# EAGLE board PCB (EAGLE 9.7.0)
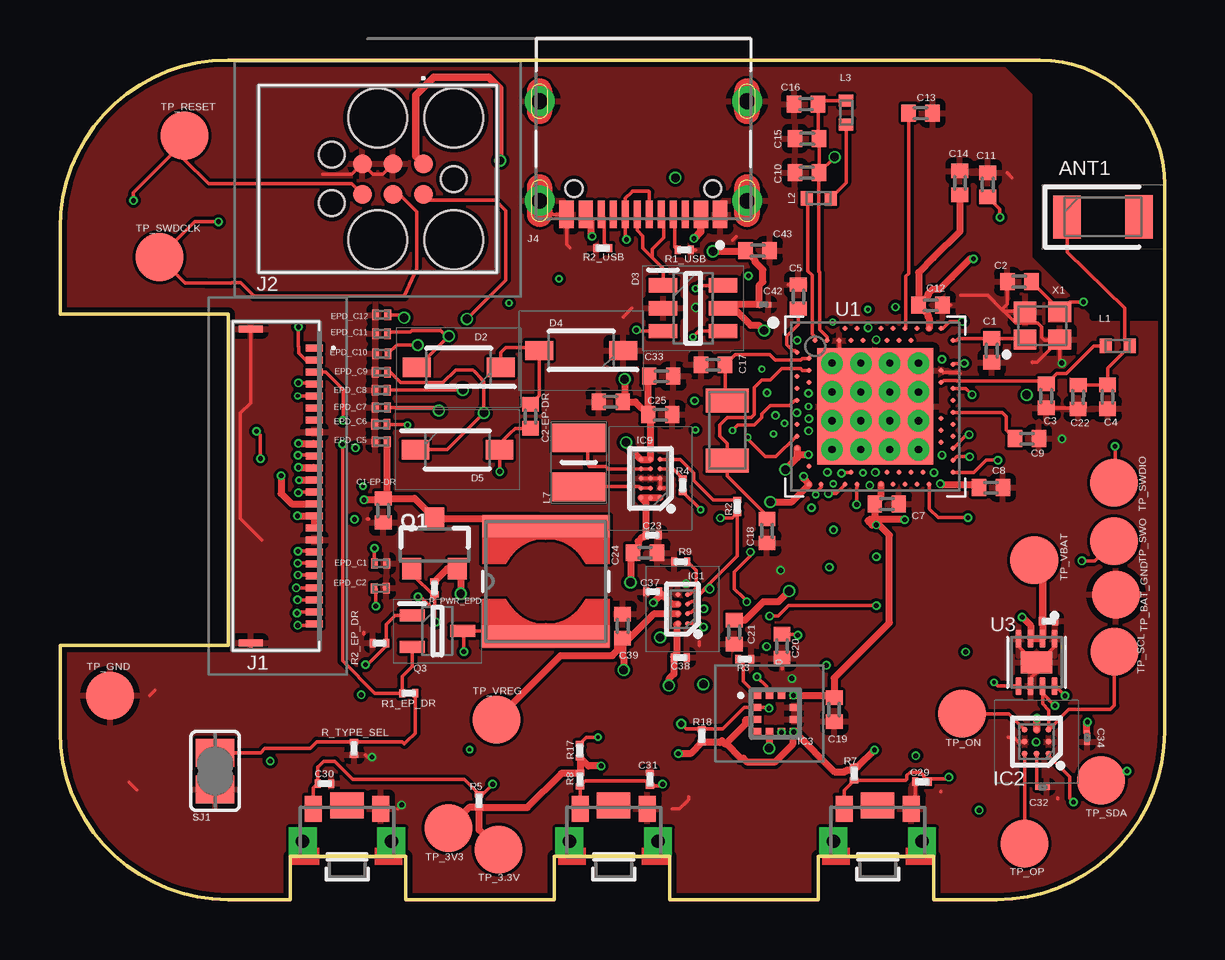
[diagram p0: board, top side]
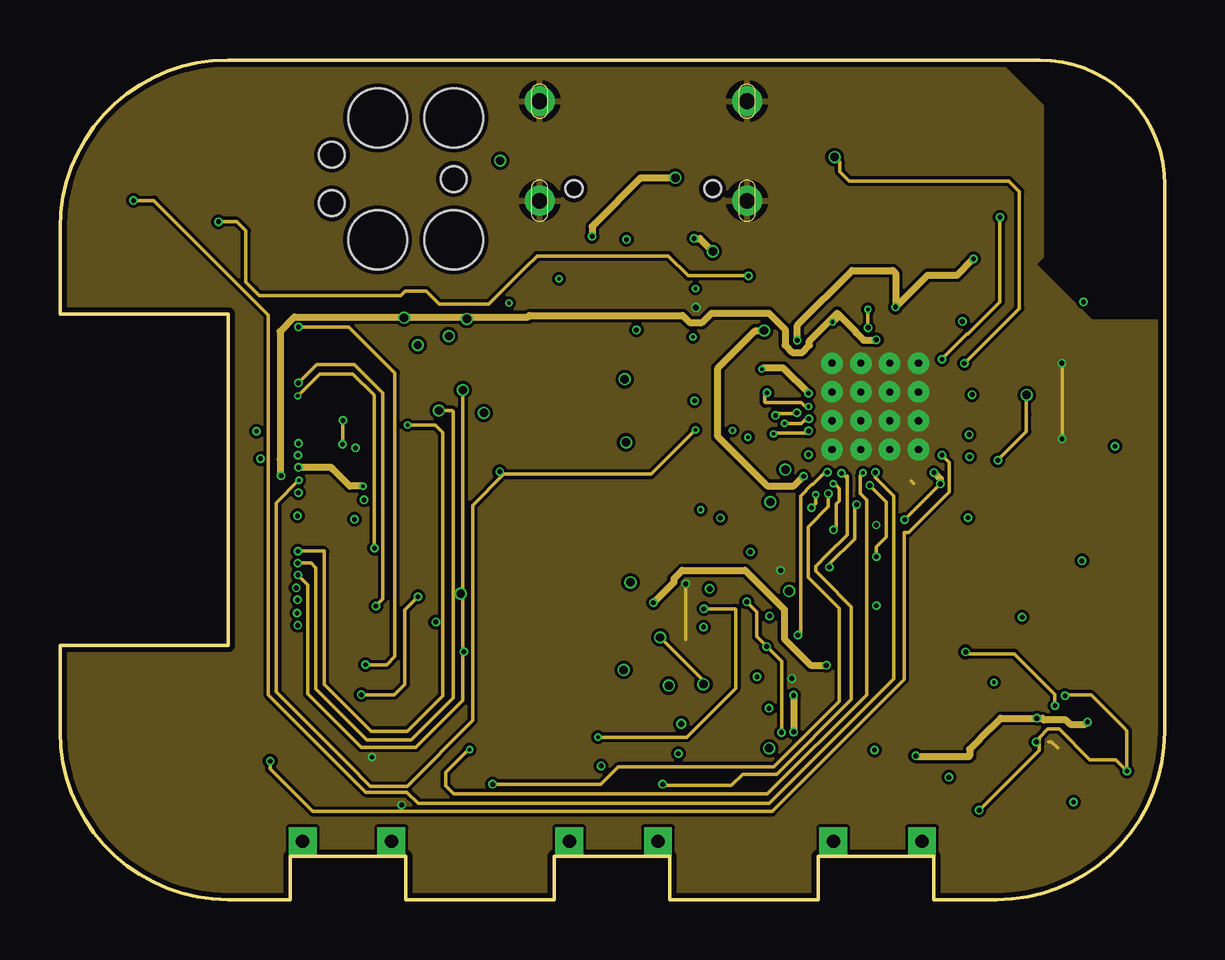
[diagram p1: board, inner layer Route2]
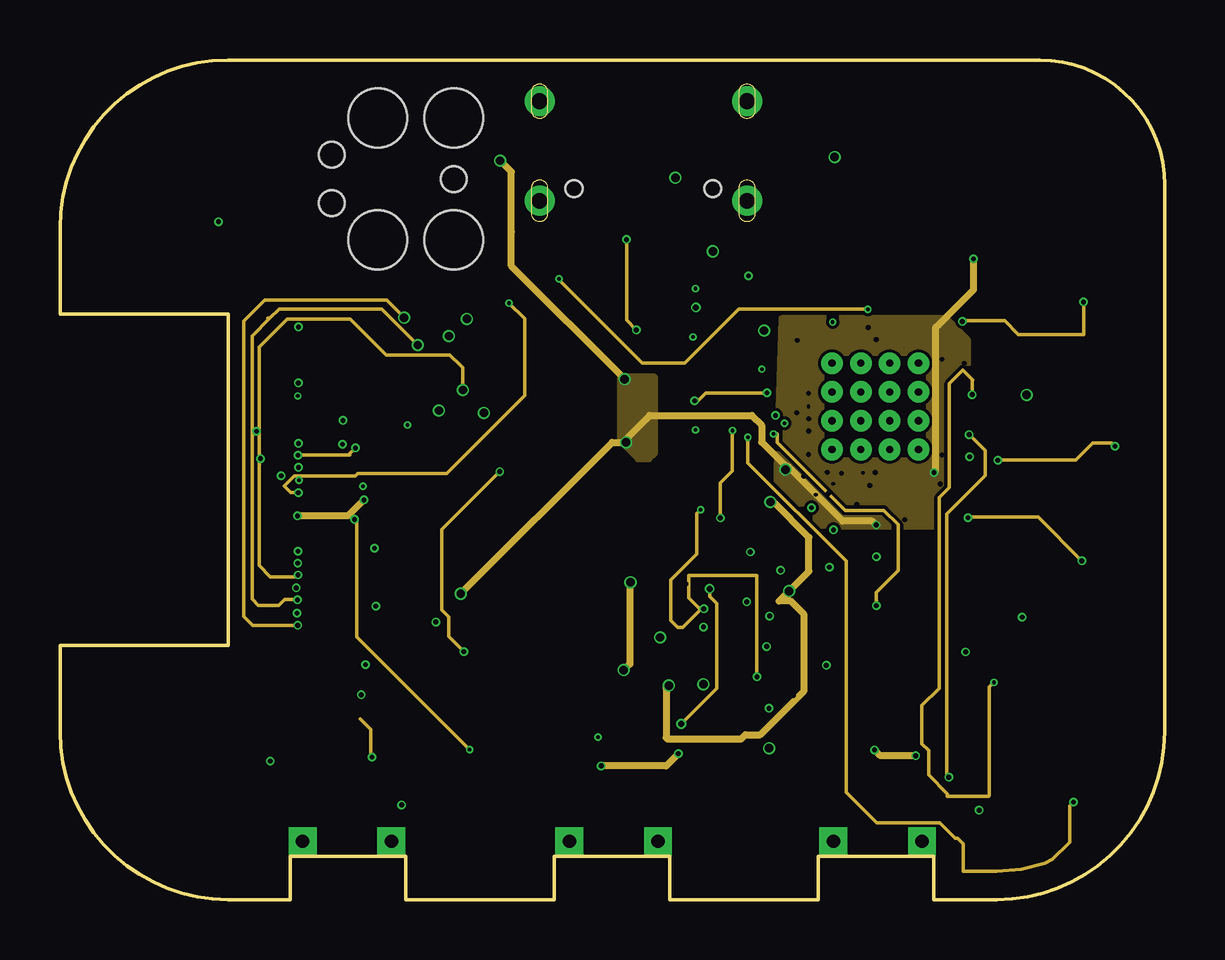
[diagram p2: board, inner layer Route15]
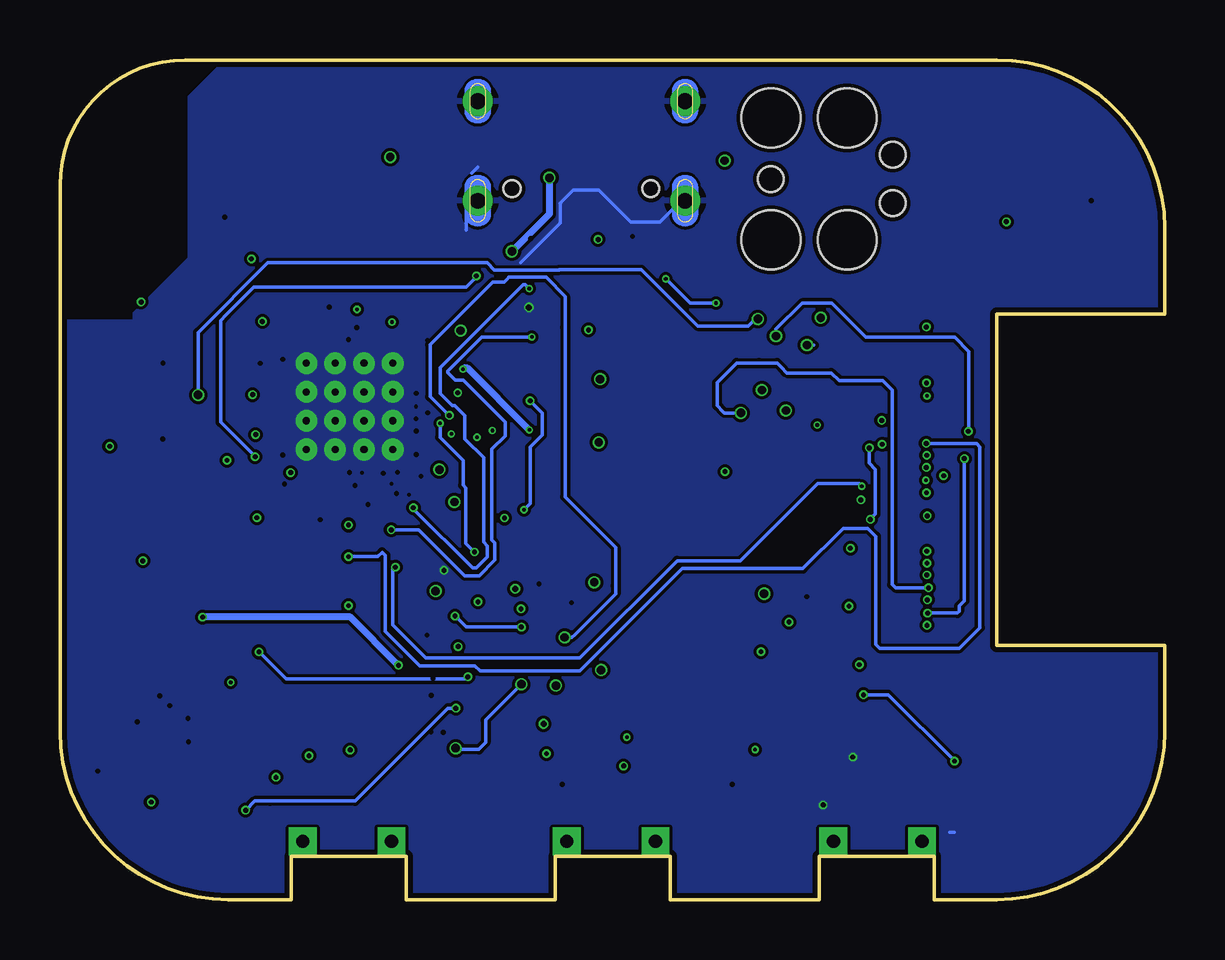
[diagram p3: board, bottom side, seen from below]

Size 46.03 x 35 mm. Coordinates in mm from the lower left corner, seen from the top.
Outline: 39.03,0 36.4,0 36.4,1.8 31.6,1.8 31.6,0 25.4,0 25.4,1.8 20.6,1.8 20.6,0 14.4,0 14.4,1.8 9.6,1.8 9.6,0 7,0 arc-90 0,7 0,10.6 7,10.6 7,24.4 0,24.4 0,28 arc-90 7,35 39,35 40.82,35 arc-90 46.03,29.79 46.03,25.91 46.03,7 arc-90 46.03,7 arc-90 39.03,0
Copper layers (1*16): Top 0.035mm / dielectric 1.6mm / Bottom 0.035mm
Design rules "jlcpcb-2layers.dru *": minimum track width 5mil, minimum drill 0.15mm, track to track 5mil, track to pad 5mil, pad to pad 5mil, via to via 5mil, smd to smd 5mil, copper to edge 0.2mm, drill to drill 6mil, minimum pad ring 0.3mm, minimum via ring 3mil, stop-mask expansion 4mil, vias tented up to drill 0mil, thermal gap 10mil

## Footprints (pad centres in the part's own frame; a part is rotated, then mirrored left to right if it is on the bottom)
2450AT18B100E_ANTC3216X140N = smd 1.15 x 1.8: 1 -1.5,0; 2 1.5,0
PERFECT_0402_0402 = smd 0.6 x 0.7: 1 -0.5,0; 2 0.5,0
GRM011R60J152KE01L_1_0201 = smd 0.35 x 0.25: 1 0,0.275; 2 0,-0.275
GRM011R60J152KE01L_2_CAPC0201X13N = smd 0.22 x 0.23: 1 -0.185,0; 2 0.185,0
ESP32_C6_LIBRARY_5_SOD3716X135N = smd 1.15 x 0.8: 1 -1.75,0; 2 1.75,0
ESP32_C6_LIBRARY_3_SOT95P280X145-6N = smd 1.2 x 0.6: 1 -1.25,0.95; 2 -1.25,0; 3 -1.25,-0.95; 4 1.25,-0.95; 5 1.25,0; 6 1.25,0.95
NORDIC_NRF_3_RESC0201_L = smd 0.28 x 0.43: 1 -0.255,0; 2 0.255,0
BQ25180YBGR_BGA8C40P2X4_100X155X50 = smd 0.2 x 0.2: A1 -0.2,0.6; A2 0.2,0.6; B1 -0.2,0.2; B2 0.2,0.2; C1 -0.2,-0.2; C2 0.2,-0.2; D1 -0.2,-0.6; D2 0.2,-0.6
DRV2605YZFR_BGA9C50P3X3_144X144X62 = smd 0.25 x 0.25: A1 -0.5,0.5; A2 0,0.5; A3 0.5,0.5; B1 -0.5,0; B2 0,0; B3 0.5,0; C1 -0.5,-0.5; C2 0,-0.5; C3 0.5,-0.5
BMA423_BMA423 = smd 0.3 x 0.35: 1 -0.75,-0.775; 2 -0.25,-0.775; 3 0.25,-0.775; 4 0.75,-0.775; 7 0.75,0.775; 8 0.25,0.775; 9 -0.25,0.775; 10 -0.75,0.775 | smd 0.35 x 0.3: 5 0.775,-0.25; 6 0.775,0.25; 11 -0.775,0.25; 12 -0.775,-0.25
RT6160AWSC_BGA15C40P3X5_140X230X60 = smd 0.216 x 0.216: A1 -0.4,0.8; A2 0,0.8; A3 0.4,0.8; B1 -0.4,0.4; B2 0,0.4; B3 0.4,0.4; C1 -0.4,0; C2 0,0; C3 0.4,0; D1 -0.4,-0.4; D2 0,-0.4; D3 0.4,-0.4; E1 -0.4,-0.8; E2 0,-0.8; E3 0.4,-0.8
503480-2400_5034802400 = smd 0.3 x 0.7: 1 -5.75,1.525; 2 -5.25,1.525; 3 -4.75,1.525; 4 -4.25,1.525; 5 -3.75,1.525; 6 -3.25,1.525; 7 -2.75,1.525; 8 -2.25,1.525; 9 -1.75,1.525; 10 -1.25,1.525; 11 -0.75,1.525; 12 -0.25,1.525; 13 0.25,1.525; 14 0.75,1.525; 15 1.25,1.525; 16 1.75,1.525; 17 2.25,1.525; 18 2.75,1.525; 19 3.25,1.525; 20 3.75,1.525; 21 4.25,1.525; 22 4.75,1.525; 23 5.25,1.525; 24 5.75,1.525 | smd 0.3 x 1: MP1 -6.54,-1.125; MP2 6.54,-1.125
TC2030-IDC_TC2030IDC = smd 0.783 x 0.783: 1 -0.953,-0.635; 2 -0.953,0.635; 3 0.317,-0.635; 4 0.317,0.635; 5 1.588,-0.635; 6 1.588,0.635 | hole 2.451: -2.223,-2.54; -2.223,2.54; 0.952,-2.54; 0.952,2.54 | hole 1.067: -2.223,0; 2.857,-1.016; 2.857,1.016
KH-TYPE-C-16P_KINGHELM_KH-TYPE-C-16P = smd 0.6 x 1.15: A1_B12 -3.2,4.725; A4_B9 -2.4,4.725; A9_B4 2.4,4.725; A12_B1 3.2,4.725 | smd 0.3 x 1.15: A5 -1.25,4.725; A6 -0.25,4.725; A7 0.25,4.725; A8 1.25,4.725; B5 1.75,4.725; B6 0.75,4.725; B7 -0.75,4.725; B8 -1.75,4.725 | drill 0.65 pad 1.05: SH1 -4.32,0; SH2 4.32,0; SH3 -4.32,4.15; SH4 4.32,4.15 | hole 0.7: -2.89,3.65; 2.89,3.65
NORDIC_NRF_2_RESC0402_L = smd 0.5 x 0.6: 1 -0.5,0; 2 0.5,0
ESP32_C6_LIBRARY_2_IND_4828-WE-TPC_WRE = smd 0.9 x 5.3: 1 -2.286,0; 2 2.286,0
MLP2016SR47MT0S1_INDC2016X100N = smd 1.2 x 2.2: 1 -1.028,0; 2 1.028,0
ESP32_C6_LIBRARY_4_ESP32_C6_LIBRARY_4_ESP32_C6_LIBRARY_4_ESP32_C6_LIBRARY_4_ESP32_WROVER_SPARKFUN-DISCRETESEMI_SOT23-3 = smd 0.8 x 0.9: 1 -0.95,-1; 2 0.95,-1; 3 0,1.1
ESP32_C6_LIBRARY_6_SOT65P210X110-3N = smd 1.05 x 0.5: 1 -1.05,0.65; 2 -1.05,-0.65; 3 1.05,0
CPF0201D7K68C1_0201 = smd 0.35 x 0.25: 1 0,0.275; 2 0,-0.275
ERA-1AEB3401C_0201 = smd 0.35 x 0.25: 1 0,0.275; 2 0,-0.275
ESP32_C6_LIBRARY_7_JUMPER_SJ = smd 1.168 x 1.6: 1 -0.762,0; 2 0.762,0
2025-10-22_07-23-44_LIBRARY_SW_EVP-AKE31A_PAN = smd 0.711 x 1.092: 1 -1.4,-0.972; 2 1.4,-0.972 | drill 0.559 pad 0.914 square: 3 -1.848,0.381; 4 1.848,0.381 | smd 1.397 x 1.092: 5 0,-1.124
HECTOR_WATCH_1_TP20R = smd 2 x 2: TP 0,0
NORDIC_NRF_4_AQFN50P700X700X85_HS-74N = smd 4.85 x 4.85: P$74 0,0 | drill 0.3 pad 0.6: P$75 -1.8,1.8; P$76 -0.6,1.8; P$77 0.6,1.8; P$78 1.8,1.8; P$79 -1.8,0.6; P$80 -0.6,0.6; P$81 0.6,0.6; P$82 1.8,0.6; P$83 -1.8,-0.6; P$84 -0.6,-0.6; P$85 0.6,-0.6; P$86 1.8,-0.6; P$87 -1.8,-1.8; P$88 -0.6,-1.8; P$89 0.6,-1.8; P$90 1.8,-1.8 | smd 0.2 x 0.2: P$A8 -1.25,3.25; P$A10 -0.75,3.25; P$A12 -0.25,3.25; P$A14 0.25,3.25; P$A16 0.75,3.25; P$A18 1.25,3.25; P$A20 1.75,3.25; P$A22 2.25,3.25; P$A23 2.75,3.25; P$AA24 3.25,-2.25; P$AB2 -2.75,-2.5; P$AC5 -2,-2.75; P$AC9 -1,-2.75; P$AC11 -0.5,-2.75; P$AC13 0,-2.75; P$AC15 0.5,-2.75; P$AC17 1,-2.75; P$AC19 1.5,-2.75; P$AC21 2,-2.75; P$AC24 3.25,-2.75; P$AD2 -2.75,-3.25; P$AD4 -2.25,-3.25; P$AD6 -1.75,-3.25; P$AD8 -1.25,-3.25; P$AD10 -0.75,-3.25; P$AD12 -0.25,-3.25; P$AD14 0.25,-3.25; P$AD16 0.75,-3.25; P$AD18 1.25,-3.25; P$AD20 1.75,-3.25; P$AD22 2.25,-3.25; P$AD23 2.75,-3.25; P$B1 -3.25,2.75; P$B3 -2.5,2.75; P$B5 -2,2.75; P$B7 -1.5,2.75; P$B9 -1,2.75; P$B11 -0.5,2.75; P$B13 0,2.75; P$B15 0.5,2.75; P$B17 1,2.75; P$B19 1.5,2.75; P$B24 3.25,2.75; P$C1 -3.25,2.25; P$D2 -2.75,2; P$D23 2.75,2; P$E24 3.25,1.75; P$F2 -2.75,1.5; P$F23 2.75,1.5; P$G1 -3.25,1.25; P$H2 -2.75,1; P$H23 2.75,1; P$J1 -3.25,0.75; P$J24 3.25,0.75; P$K2 -2.75,0.5; P$L1 -3.25,0.25; P$L24 3.25,0.25; P$M2 -2.75,0; P$N1 -3.25,-0.25; P$N24 3.25,-0.25; P$P2 -2.75,-0.5; P$P23 2.75,-0.5; P$R1 -3.25,-0.75; P$R24 3.25,-0.75; P$T2 -2.75,-1; P$T23 2.75,-1; P$U1 -3.25,-1.25; P$U24 3.25,-1.25; P$V23 2.75,-1.5; P$W1 -3.25,-1.75; P$W24 3.25,-1.75; P$Y2 -2.75,-2; P$Y23 2.75,-2
ESP32_C6_LIBRARY_SON50P200X200X80-9N = smd 0.76 x 0.27: 1 -0.985,0.75; 2 -0.985,0.25; 3 -0.985,-0.25; 4 -0.985,-0.75; 5 0.985,-0.75; 6 0.985,-0.25; 7 0.985,0.25; 8 0.985,0.75 | smd 0.9 x 1.3: 9 0,0
NORDIC_NRF_BT-XTAL_2016_N = smd 0.95 x 0.85: 1 -0.725,-0.575; 2 0.725,-0.575; 3 0.725,0.575; 4 -0.725,0.575
NORDIC_NRF_1_XTAL_3215_N = smd 1 x 1.8: 1 -1.25,0; 2 1.25,0

## Placement (x,y rotation side)
ANT1  [2450AT18B100E_ANTC3216X140N]  43.46,28.45 0.1 top
C1  12pF  [PERFECT_0402_0402]  38.82,22.89 270 top
C1-EP-DR  10uF  [PERFECT_0402_0402]  13.47,16.22 270 top
C2  12pF  [PERFECT_0402_0402]  39.97,25.76 180 top
C2-EP-DR  4.7uF/25V  [PERFECT_0402_0402]  19.61,20.14 270 top
C3  1pF  [PERFECT_0402_0402]  41.1,21 270 top
C4  1pF  [PERFECT_0402_0402]  43.65,20.96 270 top
C5  100nF  [PERFECT_0402_0402]  30.76,25.13 90 top
C6  4.7uF  [PERFECT_0402_0402]  22.95,20.75 180 top
C7  100nF  [PERFECT_0402_0402]  34.45,16.49 0 top
C8  100nF  [PERFECT_0402_0402]  38.79,17.17 0 top
C9  820pF  [PERFECT_0402_0402]  40.29,19.21 0 top
C10  N.C.  [PERFECT_0402_0402]  31.12,30.3 180 top
C11  100pF  [PERFECT_0402_0402]  38.65,29.8 90 top
C12  100nF  [PERFECT_0402_0402]  36.27,24.78 0 top
C13  N.C.  [PERFECT_0402_0402]  35.85,32.79 0 top
C14  4.7uF  [PERFECT_0402_0402]  37.49,29.87 90 top
C15  1.0uF  [PERFECT_0402_0402]  31.13,31.72 0 top
C16  47nF  [PERFECT_0402_0402]  31.08,33.15 180 top
C17  12pF  [PERFECT_0402_0402]  27.21,22.29 0 top
C18  12pF  [PERFECT_0402_0402]  29.46,15.36 90 top
C19  100nF  [PERFECT_0402_0402]  32.26,7.92 270 top
C20  4.7uF  [PERFECT_0402_0402]  30.08,10.56 270 top
C21  4.7uF  [PERFECT_0402_0402]  28.1,11.15 270 top
C22  N.C.  [PERFECT_0402_0402]  42.42,20.95 269.4 top
C23  0.1uF  [GRM011R60J152KE01L_1_0201]  24.68,15.19 90 top
C24  10uF  [PERFECT_0402_0402]  24.38,14.45 180 top
C25  22uF  [PERFECT_0402_0402]  25.01,20.21 0 top
C27  0.1uF  [GRM011R60J152KE01L_1_0201]  41.19,11.61 270 top
C29  1uF  [GRM011R60J152KE01L_1_0201]  35.92,4.91 90 top
C30  1uF  [GRM011R60J152KE01L_1_0201]  11.02,4.84 270 top
C31  1uF  [GRM011R60J152KE01L_1_0201]  24.58,5.01 0.8 top
C32  1uF  [GRM011R60J152KE01L_2_CAPC0201X13N]  40.94,4.69 180 top
C33  22uF  [PERFECT_0402_0402]  25.05,21.82 0 top
C34  0.1uF  [GRM011R60J152KE01L_2_CAPC0201X13N]  42.79,6.75 90.5 top
C37  1uF  [GRM011R60J152KE01L_1_0201]  24.7,12.83 90 top
C38  1uF  [GRM011R60J152KE01L_1_0201]  25.85,10.09 270 top
C39  10uF  [PERFECT_0402_0402]  23.44,11.4 90 top
C42  0.1uF  [GRM011R60J152KE01L_2_CAPC0201X13N]  29.33,24.8 0 top
C43  4.7uF  [PERFECT_0402_0402]  29.07,27.05 0 top
D2  MBR0530  [ESP32_C6_LIBRARY_5_SOD3716X135N]  16.61,22.18 180 top
D3  USBLC6-2SC6Y  [ESP32_C6_LIBRARY_3_SOT95P280X145-6N]  26.38,24.65 0 top
D4  MBR0530  [ESP32_C6_LIBRARY_5_SOD3716X135N]  21.72,22.89 180 top
D5  MBR0530  [ESP32_C6_LIBRARY_5_SOD3716X135N]  16.56,18.75 0 top
EPD_C1  1uF/50V  [NORDIC_NRF_3_RESC0201_L]  13.36,14.01 180 top
EPD_C2  1uF/50V  [NORDIC_NRF_3_RESC0201_L]  13.35,12.98 181 top
EPD_C5  0.1uF/50V  [NORDIC_NRF_3_RESC0201_L]  13.38,19.09 0 top
EPD_C6  1uF/50V  [NORDIC_NRF_3_RESC0201_L]  13.37,19.81 0 top
EPD_C7  1uF/50V  [NORDIC_NRF_3_RESC0201_L]  13.39,20.51 0 top
EPD_C8  1uF/50V  [NORDIC_NRF_3_RESC0201_L]  13.38,21.23 0 top
EPD_C9  1uF/50V  [NORDIC_NRF_3_RESC0201_L]  13.39,21.98 0 top
EPD_C10  1uF/50V  [NORDIC_NRF_3_RESC0201_L]  13.41,22.75 0 top
EPD_C11  1uF/50V  [NORDIC_NRF_3_RESC0201_L]  13.4,23.59 0 top
EPD_C12  1uF/50V  [NORDIC_NRF_3_RESC0201_L]  13.41,24.37 0 top
IC1  BQ25180YBGR  [BQ25180YBGR_BGA8C40P2X4_100X155X50]  25.94,12.11 180 top
IC2  DRV2605YZFR  [DRV2605YZFR_BGA9C50P3X3_144X144X62]  40.69,6.58 180 top
IC3  BMA421  [BMA423_BMA423]  29.81,7.76 270 top
IC9  RT6160AWSC  [RT6160AWSC_BGA15C40P3X5_140X230X60]  24.61,17.55 180 top
J1  503480-2400  [503480-2400_5034802400]  9.07,17.24 270 top
J2  TC2030-IDC  [TC2030-IDC_TC2030IDC]  14.19,30.04 180 top
J4  KH-TYPE-C-16P  [KH-TYPE-C-16P_KINGHELM_KH-TYPE-C-16P]  24.31,33.28 180 top
L1  3.9nH  [NORDIC_NRF_2_RESC0402_L]  44.07,23.08 0 top
L2  10uH  [NORDIC_NRF_2_RESC0402_L]  31.6,29.23 0 top
L3  15nH  [NORDIC_NRF_2_RESC0402_L]  32.76,32.8 90 top
L5  68uH  [ESP32_C6_LIBRARY_2_IND_4828-WE-TPC_WRE]  20.24,13.27 90 top
L7  FTC252012SR47MBCA  [MLP2016SR47MT0S1_INDC2016X100N]  21.62,18.22 90 top
Q1  20V/4.2A/52mΩ/1.4W  [ESP32_C6_LIBRARY_4_ESP32_C6_LIBRARY_4_ESP32_C6_LIBRARY_4_ESP32_C6_LIBRARY_4_ESP32_WROVER_SPARKFUN-DISCRETESEMI_SOT23-3]  15.61,14.78 0 top
Q3  SI1308EDL-T1-GE3  [ESP32_C6_LIBRARY_6_SOT65P210X110-3N]  15.73,11.19 0 top
R1_EP_DR  0.47  [CPF0201D7K68C1_0201]  14.53,8.6 270.8 top
R1_USB  5K1  [CPF0201D7K68C1_0201]  26.01,27.08 270 top
R2  0  [ERA-1AEB3401C_0201]  28.22,16.38 180 top
R2_EP_DR  10K  [CPF0201D7K68C1_0201]  13.31,10.69 90 top
R2_USB  5K1  [CPF0201D7K68C1_0201]  22.62,27.15 270 top
R3  0  [ERA-1AEB3401C_0201]  28.54,10.03 270 top
R4  0  [ERA-1AEB3401C_0201]  25.95,17.27 179.9 top
R5  10K  [ERA-1AEB3401C_0201]  17.46,4.11 0 top
R7  10K  [ERA-1AEB3401C_0201]  33.09,5.25 180 top
R8  10K  [ERA-1AEB3401C_0201]  21.67,5 180 top
R9  10K  [CPF0201D7K68C1_0201]  25.86,14.09 90 top
R17  3K3  [ERA-1AEB3401C_0201]  21.65,6.21 180 top
R18  3K3  [ERA-1AEB3401C_0201]  26.74,6.82 180 top
R_PWR_EPD  10K  [ERA-1AEB3401C_0201]  15.61,12.98 180 top
R_TYPE_SEL  2.2  [CPF0201D7K68C1_0201]  12.25,6.3 180 top
SJ1  [ESP32_C6_LIBRARY_7_JUMPER_SJ]  6.46,5.36 90 top
SW_DN  2025-10-22_07-23-44_LIBRARY_EVP-AKE31ASW_EVP-AKE31A_PAN  [2025-10-22_07-23-44_LIBRARY_SW_EVP-AKE31A_PAN]  34.07,2.81 180 top
SW_ENT  2025-10-22_07-23-44_LIBRARY_EVP-AKE31ASW_EVP-AKE31A_PAN  [2025-10-22_07-23-44_LIBRARY_SW_EVP-AKE31A_PAN]  23.07,2.81 180 top
SW_UP  2025-10-22_07-23-44_LIBRARY_EVP-AKE31ASW_EVP-AKE31A_PAN  [2025-10-22_07-23-44_LIBRARY_SW_EVP-AKE31A_PAN]  11.96,2.81 180 top
TP_3.3V  HECTOR_WATCH_1_TPTP20R  [HECTOR_WATCH_1_TP20R]  18.26,2.09 0 top
TP_3V3  HECTOR_WATCH_1_TPTP20R  [HECTOR_WATCH_1_TP20R]  16.18,2.98 0 top
TP_BAT_GND  HECTOR_WATCH_1_TPTP20R  [HECTOR_WATCH_1_TP20R]  44,12.72 0 top
TP_GND  HECTOR_WATCH_1_TPTP20R  [HECTOR_WATCH_1_TP20R]  2.09,8.51 0 top
TP_ON  HECTOR_WATCH_1_TPTP20R  [HECTOR_WATCH_1_TP20R]  37.59,7.75 0 top
TP_OP  HECTOR_WATCH_1_TPTP20R  [HECTOR_WATCH_1_TP20R]  40.19,2.33 0 top
TP_RESET  HECTOR_WATCH_1_TPTP20R  [HECTOR_WATCH_1_TP20R]  5.18,31.84 0 top
TP_SCL  HECTOR_WATCH_1_TPTP20R  [HECTOR_WATCH_1_TP20R]  43.93,10.33 0 top
TP_SDA  HECTOR_WATCH_1_TPTP20R  [HECTOR_WATCH_1_TP20R]  43.38,4.97 0 top
TP_SWDCLK  HECTOR_WATCH_1_TPTP20R  [HECTOR_WATCH_1_TP20R]  4.14,26.78 0 top
TP_SWDIO  HECTOR_WATCH_1_TPTP20R  [HECTOR_WATCH_1_TP20R]  43.92,17.38 0 top
TP_SWO  HECTOR_WATCH_1_TPTP20R  [HECTOR_WATCH_1_TP20R]  43.93,14.94 0 top
TP_VBAT  HECTOR_WATCH_1_TPTP20R  [HECTOR_WATCH_1_TP20R]  40.59,14.16 0 top
TP_VREG  HECTOR_WATCH_1_TPTP20R  [HECTOR_WATCH_1_TP20R]  18.18,7.49 0 top
U1  NRF52840_QF  [NORDIC_NRF_4_AQFN50P700X700X85_HS-74N]  33.97,20.56 0 top
U3  MAX17048G+T10  [ESP32_C6_LIBRARY_SON50P200X200X80-9N]  40.69,9.88 270 top
X1  32MHz  [NORDIC_NRF_BT-XTAL_2016_N]  40.93,23.92 0 top
X2  32.768kHz  [NORDIC_NRF_1_XTAL_3215_N]  27.8,19.56 270 top

## Library data of the parts
ANT1 = InkTime_v5; ARROW_PART_NUMBER: 2450AT18B100E; ARROW_PRICE-STOCK: https://www.arrow.com/en/products/2450at18b100e/johanson-dielectrics?utm_currency=USD&region=nac; DESCRIPTION: Antennas 2.45GHz ANTENNA; HEIGHT: 1.4mm; MANUFACTURER_NAME: JOHANSON TECHNOLOGY; MANUFACTURER_PART_NUMBER: 2450AT18B100E; MOUSER_PART_NUMBER: 609-2450AT18B100E; MOUSER_PRICE-STOCK: https://www.mouser.co.uk/ProductDetail/Johanson-Technology/2450AT18B100E?qs=yCnrNFeXz%252Bh5MFsFIXGZGA%3D%3D
C1 C1-EP-DR C2 C2-EP-DR C3-C25 C27 C29-C31 C33 C37-C39 C43 EPD_C1 EPD_C2 EPD_C5-EPD_C12 L1-L3 R1_EP_DR R1_USB R2 R2_EP_DR R2_USB R3-R5 R7-R9 R17 R18 R_PWR_EPD R_TYPE_SEL SJ1 TP_3.3V TP_3V3 TP_BAT_GND TP_GND TP_ON TP_OP TP_RESET TP_SCL TP_SDA TP_SWDCLK TP_SWDIO TP_SWO TP_VBAT TP_VREG U1 X1 X2 = InkTime_v5
C32 C34 C42 = InkTime_v5; AVAILABILITY: In Stock; CHECK_PRICES: https://www.snapeda.com/parts/GRM011R60J152KE01L/Murata/view-part/?ref=eda; DESCRIPTION: SMD Capacitor X5R(EIA) with Capacitance: 1500pF Tol. 10%. Rated Voltage: 6.3Vdc; MF: Murata; MP: GRM011R60J152KE01L; PACKAGE: 0201 Murata; PRICE: None; SNAPEDA_LINK: https://www.snapeda.com/parts/GRM011R60J152KE01L/Murata/view-part/?ref=snap
D2 D4 D5 = InkTime_v5; AVAILABILITY: In Stock; CHECK_PRICES: https://www.snapeda.com/parts/MBR0530/Onsemi/view-part/?ref=eda; DESCRIPTION: Diode Schottky 30 V 500mA Surface Mount SOD-123; MF: ON Semiconductor; MP: MBR0530; PACKAGE: SOD-123-2 ON Semiconductor; PRICE: None; PURCHASE-URL: https://www.snapeda.com/api/url_track_click_mouser/?unipart_id=179458&manufacturer=ON Semiconductor&part_name=MBR0530&search_term=None; SNAPEDA_LINK: https://www.snapeda.com/parts/MBR0530/Onsemi/view-part/?ref=snap
D3 = InkTime_v5; AVAILABILITY: In Stock; CHECK_PRICES: https://www.snapeda.com/parts/USBLC6-2SC6Y/STMicroelectronics/view-part/?ref=eda; DESCRIPTION: 17V Clamp 5A (8/20µs) Ipp Tvs Diode Surface Mount SOT-23-6; MF: STMicroelectronics; MP: USBLC6-2SC6Y; PACKAGE: SOT-23-6 STMicroelectronics; PRICE: None; SNAPEDA_LINK: https://www.snapeda.com/parts/USBLC6-2SC6Y/STMicroelectronics/view-part/?ref=snap
IC1 = InkTime_v5; ARROW_PART_NUMBER: BQ25180YBGR; ARROW_PRICE-STOCK: https://www.arrow.com/en/products/bq25180ybgr/texas-instruments?utm_currency=USD&region=nac; DESCRIPTION: Charger IC Lithium Ion/Polymer, Lithium Iron Phosphate 8-DSBGA (1.6x1.1); HEIGHT: 0.5mm; MANUFACTURER_NAME: Texas Instruments; MANUFACTURER_PART_NUMBER: BQ25180YBGR; MOUSER_PART_NUMBER: 595-BQ25180YBGR; MOUSER_PRICE-STOCK: https://www.mouser.co.uk/ProductDetail/Texas-Instruments/BQ25180YBGR?qs=doiCPypUmgEWjAK%252BJAX6Tw%3D%3D
IC2 = InkTime_v5; ARROW_PART_NUMBER: DRV2605YZFR; ARROW_PRICE-STOCK: https://www.arrow.com/en/products/drv2605yzfr/texas-instruments?region=nac; DESCRIPTION: Haptic Driver for ERM/LRA with Built-In Library and Smart Loop Architecture; HEIGHT: 0.625mm; MANUFACTURER_NAME: Texas Instruments; MANUFACTURER_PART_NUMBER: DRV2605YZFR
IC3 = InkTime_v5; ARROW_PART_NUMBER: BMA423; ARROW_PRICE-STOCK: https://www.arrow.com/en/products/bma423/bosch; DESCRIPTION: Accelerometers Triaxial low-g 12bit Acceleration Sensor; HEIGHT: 1mm; MANUFACTURER_NAME: BOSCH; MANUFACTURER_PART_NUMBER: BMA423; MOUSER_PART_NUMBER: 262-BMA423; MOUSER_PRICE-STOCK: https://www.mouser.co.uk/ProductDetail/Bosch-Sensortec/BMA423?qs=HXFqYaX1Q2xC%252BSgeGoX3mg%3D%3D
IC9 = InkTime_v5; DESCRIPTION: Buck-Boost Regulator Positive Output Step-Up/Step-Down I2C DC-DC Controller IC 15-WL-CSP (BSC) (1.4x2.3); HEIGHT: 0.6mm; MANUFACTURER_NAME: RICHTEK; MANUFACTURER_PART_NUMBER: RT6160AWSC; MOUSER_PART_NUMBER: 835-RT6160AWSC; MOUSER_PRICE-STOCK: https://www.mouser.co.uk/ProductDetail/Richtek/RT6160AWSC?qs=amGC7iS6iy%2FLd9PSoixZXQ%3D%3D
J1 = InkTime_v5; DESCRIPTION: FFC & FPC Connectors 0.5mm FPC RA SMT Dual Contact 24Ckt; HEIGHT: 1.87mm; MANUFACTURER_NAME: Molex; MANUFACTURER_PART_NUMBER: 503480-2400; MOUSER_PART_NUMBER: 538-503480-2400; MOUSER_PRICE-STOCK: https://www.mouser.co.uk/ProductDetail/Molex/503480-2400?qs=OAhjpuo3Vu7efIoxFh9AOw%3D%3D
J2 = InkTime_v5; DESCRIPTION: CABLE ADAPTER 6 POS; HEIGHT: 19mm; MANUFACTURER_NAME: Tag Connect; MANUFACTURER_PART_NUMBER: TC2030-IDC
J4 = InkTime_v5; AVAILABILITY: Not in stock; CHECK_PRICES: https://www.snapeda.com/parts/KH-TYPE-C-16P/Kinghelm/view-part/?ref=eda; MF: kinghelm; MP: KH-TYPE-C-16P; PACKAGE: None; PRICE: None; SNAPEDA_LINK: https://www.snapeda.com/parts/KH-TYPE-C-16P/Kinghelm/view-part/?ref=snap
L5 = InkTime_v5; COPYRIGHT: Copyright (C) 2024 Ultra Librarian. All rights reserved.; MANUFACTURER_PART_NUMBER: 744043680; MFR_NAME: Wurth Electronics
L7 = InkTime_v5; DESCRIPTION: SMD / SMT Inductors (Coils), L=0.47?H, L x W x T :; HEIGHT: 1mm; JLCPCB: https://jlcpcb.com/partdetail/6763488-FTC252012SR47MBCA/C5832368; MANUFACTURER_NAME: TDK; MANUFACTURER_PART_NUMBER: FTC252012SR47MBCA
Q1 = InkTime_v5; PROD_ID: TRAN-14388
Q3 = InkTime_v5; AVAILABILITY: In Stock; CHECK_PRICES: https://www.snapeda.com/parts/SI1308EDL-T1-GE3/Vishay+Siliconix/view-part/?ref=eda; DESCRIPTION: Si1308EDL-T1-GE3 N-channel MOSFET Transistor, 1.5 A, 30 V, 3-Pin SC-70 | Siliconix / Vishay SI1308EDL-T1-GE3; MF: Vishay Siliconix; MP: SI1308EDL-T1-GE3; PACKAGE: SOT-323 Vishay Semiconductor; PRICE: None; PURCHASE-URL: https://www.snapeda.com/api/url_track_click_mouser/?unipart_id=274603&manufacturer=Vishay Siliconix&part_name=SI1308EDL-T1-GE3&search_term=None; SNAPEDA_LINK: https://www.snapeda.com/parts/SI1308EDL-T1-GE3/Vishay+Siliconix/view-part/?ref=snap
SW_DN SW_ENT SW_UP = InkTime_v5; COPYRIGHT: Copyright (C) 2025 Ultra Librarian. All rights reserved.; DIGI-KEY_PART_NUMBER_1: P123437TR-ND; DIGI-KEY_PART_NUMBER_2: P123437CT-ND; DIGI-KEY_PART_NUMBER_3: P123437DKR-ND; MANUFACTURER_NAME: Panasonic; MANUFACTURER_PART_NUMBER: EVP-AKE31A
U3 = InkTime_v5; AVAILABILITY: In Stock; CHECK_PRICES: https://www.snapeda.com/parts/MAX17048G+T10/Analog+Devices/view-part/?ref=eda; DESCRIPTION: 3µA 1-Cell/2-Cell Fuel Gauge with ModelGauge; MF: Analog Devices; MP: MAX17048G+T10; PACKAGE: TDFN-8 Maxim; PRICE: None; PURCHASE-URL: https://www.snapeda.com/api/url_track_click_mouser/?unipart_id=329239&manufacturer=Analog Devices&part_name=MAX17048G+T10&search_term=None; SNAPEDA_LINK: https://www.snapeda.com/parts/MAX17048G+T10/Analog+Devices/view-part/?ref=snap

## Nets
3V3: C6.1 C7.1 C8.1 C12.1 C14.1 C19.1 C25.1 C33.1 C34.2 IC2.C2 IC3.3 IC3.7 IC3.10 IC9.E2 IC9.E3 J2.1 Q1.2 R5.2 R7.2 R8.2 R17.1 R18.1 R_PWR_EPD.2 TP_3.3V.TP TP_3V3.TP U1.P$A22 U1.P$AD14 U1.P$AD23 U1.P$B1 U1.P$W1 U1.P$Y2
ALERT: U1.P$J24 U3.5
D+: D3.4 U1.P$AD6
D-: D3.6 U1.P$AD4
DN: D3.1 J4.A7 J4.B7
DP: D3.3 J4.A6 J4.B6
EPD_3V3: C1-EP-DR.1 EPD_C5.2 J1.15 J1.16 L5.2 Q1.3
EPD_BUSY: J1.9 U1.P$AD12
EPD_CS: J1.12 U1.P$K2
EPD_DC: J1.11 U1.P$AD10
EPD_RST: J1.10 U1.P$AC11
GDR: J1.2 Q3.1 R2_EP_DR.2
GND: C1-EP-DR.2 C1.2 C2.2 C3.2 C4.2 C5.2 C6.2 C7.2 C8.2 C9.2 C10.2 C11.2 C12.2 C13.2 C14.2 C15.1 C16.2 C17.1 C18.1 C19.2 C20.2 C21.2 C22.2 C23.2 C24.1 C25.2 C27.1 C29.1 C30.1 C31.1 C32.1 C33.2 C34.1 C37.1 C38.1 C39.2 C42.2 C43.2 D3.2 D4.1 EPD_C1.1 EPD_C2.1 EPD_C5.1 EPD_C6.1 EPD_C7.1 EPD_C8.1 EPD_C9.1 EPD_C10.1 EPD_C11.1 EPD_C12.1 IC1.D2 IC2.B1 IC2.B3 IC3.8 IC3.9 IC9.B1 IC9.C1 IC9.C2 IC9.C3 J1.8 J1.17 J1.MP1 J1.MP2 J2.3 J2.5 J4.A1_B12 J4.A12_B1 J4.SH1 J4.SH2 J4.SH3 J4.SH4 R1_USB.1 R2_EP_DR.1 R2_USB.2 R3.1 R9.1 R_TYPE_SEL.1 SJ1.1 SW_DN.1 SW_ENT.1 SW_UP.1 TP_BAT_GND.TP TP_GND.TP U1.P$74 U1.P$75 U1.P$76 U1.P$77 U1.P$78 U1.P$79 U1.P$80 U1.P$81 U1.P$82 U1.P$83 U1.P$84 U1.P$85 U1.P$86 U1.P$87 U1.P$88 U1.P$89 U1.P$90 U1.P$B7 U1.P$F23 U3.1 U3.4 U3.6 U3.9 X1.2 X1.4
HAPTIC_EN: IC2.A1 U1.P$U1
IMU_INT1: IC3.5 U1.P$N1
IMU_INT2: IC3.6 U1.P$P2
LX1: IC9.B2 IC9.B3 L7.1
LX2: IC9.D2 IC9.D3 L7.2
MOSI: J1.14 U1.P$B13
N$1: IC1.D1 R9.2
N$2: IC9.D1 R4.2
N$3: IC9.E1 R2.2
N$4: IC3.1 R3.2
N$5: C20.1 U1.P$AC5
N$6: C9.1 U1.P$N24
N$7: ANT1.1 C4.1 C22.1 L1.2
N$8: C3.1 L1.1 U1.P$H23
N$9: C2.1 U1.P$A23 X1.3
N$10: C1.1 U1.P$B24 X1.1
N$11: C5.1 U1.P$C1
N$12: C18.2 U1.P$F2 X2.2
N$13: C17.2 U1.P$D2 X2.1
N$14: C11.1 U1.P$D23
N$15: C2-EP-DR.2 D5.2 L5.1 Q3.3
N$16: C13.1 U1.P$A18
N$17: L2.2 L3.1
N$18: L2.1 U1.P$B3
N$19: C10.1 C15.2 C16.1 L3.2 U1.P$B5 U1.P$E24
N$20: C2-EP-DR.1 D2.1 D4.2
N$22: EPD_C2.2 J1.4
N$23: R1_EP_DR.1 R_TYPE_SEL.2 SJ1.2
N$24: EPD_C1.2 J1.5
N$25: C32.2 IC2.A2
N$27: EPD_C6.2 J1.18
N$28: EPD_C7.2 J1.19
N$29: J4.A5 R1_USB.2
N$30: J4.B5 R2_USB.1
N$31: EPD_C8.2 J1.20
N$33: EPD_C10.2 J1.22
N$35: EPD_C12.2 J1.24
OUT+: IC2.A3 TP_OP.TP
OUT-: IC2.C3 TP_ON.TP
P0.04: U1.P$J1
P0.09: U1.P$L24
P0.13: C30.2 R5.1 SW_UP.2 U1.P$AD8
P0.14: C31.2 R8.1 SW_ENT.2 U1.P$AC9
P0.19: U1.P$AC15
P0.20: U1.P$AD16
P0.21: U1.P$AC17
P0.22: U1.P$AD18
P0.23: U1.P$AC19
P0.24: U1.P$AD20
P0.25: U1.P$AC21
P0.26: U1.P$G1
P0.27: U1.P$H2
P0.28: U1.P$B11
P0.29: U1.P$A10
P0.30: U1.P$B9
P0.31: U1.P$A8
P1.01: Q1.1 R_PWR_EPD.1 U1.P$Y23
P1.02: C29.2 R7.1 SW_DN.2 U1.P$W24
P1.03: U1.P$V23
P1.04: U1.P$U24
P1.05: U1.P$T23
P1.06: U1.P$R24
P1.07: U1.P$P23
P1.09: U1.P$R1
P1.10: U1.P$A20
P1.11: U1.P$B19
P1.12: U1.P$B17
P1.13: U1.P$A16
P1.14: U1.P$B15
P1.15: U1.P$A14
PMIC_INT: IC1.A1 U1.P$T2
PREVGH: D5.1 EPD_C9.2 J1.21
PREVGL: D2.2 EPD_C11.2 J1.23
RESE: J1.3 Q3.2 R1_EP_DR.2
RESET: J2.6 TP_RESET.TP U1.P$AC13
SCK: J1.13 U1.P$A12
SCL: IC1.B1 IC2.C1 IC3.12 R4.1 R17.2 TP_SCL.TP U1.P$M2 U3.7
SDA: IC1.C1 IC2.B2 IC3.2 R2.1 R18.2 TP_SDA.TP U1.P$L1 U3.8
SWDCLK: J2.4 TP_SWDCLK.TP U1.P$AA24
SWDIO: J2.2 TP_SWDIO.TP U1.P$AC24
SWO: TP_SWO.TP U1.P$AD22
VBAT: C27.2 C37.2 IC1.C2 TP_VBAT.TP U3.2 U3.3
VBUS: C21.1 C38.2 C42.1 C43.1 D3.5 IC1.A2 J4.A4_B9 J4.A9_B4 U1.P$AD2
VREG: C23.1 C24.2 C39.1 IC1.B2 IC9.A1 IC9.A2 IC9.A3 TP_VREG.TP

## Tracks (layer width: path | path; a pad name or v marks a point on that pad's centre or on a via)
3V3  (via drill 0.2, 0.2 layers 1-2, 0.35)
  Top 0.3: 30.63,6.97 IC3.7 v30.57,6.99 | 30.63,6.97 32.26,5.33 32.72,5.33 32.79,5.4 32.97,5.4 R7.2 33.23,5.52 v33.94,6.24 | C25.1 24.61,20.12 IC9.E2 IC9.E3 23.59,18.98 v23.59,19.06 | C25.1 24.51,21.78 C33.1 | C25.1 23.97,20.75 C6.1 23.53,20.83 v23.53,21.69 | R_PWR_EPD.2 16.13,13.78 Q1.2 16.7,13.64 v16.7,12.75 | C8.1 38.15,17.31 U1.P$AD23 36.7,17.31 v36.68,17.33 | R5.2 17.04,3.84 TP_3V3.TP | TP_3.3V.TP 17.46,2.9 R5.2 | R5.2 19.48,3.84 20.88,5.24 20.91,5.27 R8.2 21.67,5.92 R17.1 22.02,5.57 v22.55,5.57 | 27.75,6.5 28.58,7.33 28.58,7.51 IC3.3 | 27.75,6.5 27.72,6.47 27.62,6.57 27.58,6.62 27.51,6.54 R18.1 26.27,6.08 v25.76,6.08 | C14.1 37.49,27.85 36.39,26.75 35.77,26.14 C12.1 | C12.1 36.17,24.38 36.17,24.3 36.22,24.25 U1.P$A22 | U1.P$AD14 34.22,17.18 34.22,16.76 C7.1 33.95,15.68 v34.01,15.61 33.84,15.61 33.83,15.63 | U1.P$B1 v30.72,23.32 | C12.1 36.17,25.17 36.17,25.25 36.35,25.43 36.64,25.43 37.16,25.95 37.92,26.71 v38.06,26.71 | 27.75,6.5 28.37,5.89 28.47,5.89 28.64,5.72 29.77,5.72 30.54,6.49 30.54,6.88 30.63,6.97 | v30.56,8.51 v30.57,8.51 IC3.10 32.17,8.51 C19.1 32.26,9.24 34.56,11.54 34.56,15.19 34.12,15.63 33.83,15.63 | v30.23,17.92 30.72,18.42 30.85,18.55 31.21,18.55 | 33.83,15.63 33.85,15.63 33.81,15.67 33.78,15.67 33.69,15.77 33.67,15.78 33.73,15.84 v35.19,15.84 | U1.P$Y2 31.21,18.55 | 31.21,18.55 v31.19,18.55 | C34.2 42.79,7.38 v42.81,7.4
  Top 0.305: J2.1 14.82,30.99 14.82,32.26 14.82,33.53 15.57,34.27 17.87,34.27 17.92,34.22 18.32,33.83 18.32,32.68 18.32,30.82 v18.34,30.8 | U1.P$W1 30.72,18.42 | v40.7,7.55 40.7,7.09 IC2.C2
  Route2 0.152: v36.68,17.33 v35.19,15.84
  Route2 0.3: v30.72,23.32 30.72,23.94 33.01,26.23 34.7,26.23 34.72,26.2 34.82,26.11 v34.82,24.7 36.06,25.95 36.15,26.03 36.91,26.03 37.38,26.03 v38.06,26.71 | v35.66,5.99 35.69,5.96 36.47,5.96 37.87,5.96 37.91,5.99 37.91,6.27 38.75,7.11 38.85,7.22 39.19,7.55 v40.7,7.55 40.94,7.55 41.01,7.48 41.91,7.48 42.09,7.3 42.72,7.3 v42.81,7.4 | v30.56,8.51 v30.56,6.99 v30.57,6.99 | v36.42,17.8 36.68,17.54 v36.68,17.33
  Route15 0.3: v16.7,12.75 23.01,19.06 23.44,19.06 | 23.44,19.06 v23.59,19.06 | v18.34,30.8 18.8,30.34 18.8,27.84 18.8,26.42 v23.53,21.69 | 23.44,19.06 24.57,20.18 28.83,20.18 29.24,19.78 29.24,19.07 30.25,18.05 30.35,18.05 30.25,17.95 | v35.66,5.99 34.18,5.99 v33.94,6.24 | v25.76,6.08 25.25,5.57 v22.55,5.57 | 30.25,17.95 v30.23,17.92 | v38.06,26.71 38.06,25.42 36.62,23.97 36.48,23.84 36.48,17.86 v36.42,17.8 | 30.25,17.95 30.45,17.95 32.61,15.78 33.84,15.78 v34.01,15.61
  pour Route15: 24.09,18.38 24.54,18.38 24.78,18.61 24.78,21.78 23.34,21.78 23.35,21.38 23.35,21.37 23.35,21.35 23.35,21.32 23.35,21.32 23.35,21.25 23.36,21.23 23.36,21.17 23.34,21.11 23.34,19.13
  pour Route15: 30.91,15.58 37.82,15.58 37.82,23.32 36.93,24.22 30.07,24.22 29.83,16.66
ALERT  (via drill 0.15, 0.2)
  Top 0.152: U3.5 39.07,8.9 v38.92,9.05 | U1.P$J24 37.74,21.31 v38,21.05
  Route15 0.152: v38,21.05 38,21.62 38.04,21.66 37.62,22.07 37.06,21.51 37.06,17.17 36.64,16.75 36.64,8.81 35.91,8.09 35.91,6.49 36.19,6.22 36.19,5.19 36.98,4.4 36.98,4.31 38.69,4.31 38.72,4.34 38.72,8.85 v38.92,9.05
D+  (via drill 0.15, 0.15 layers 1-2, 0.2)
  Top 0.152: D3.4 26.62,23.7 v26.37,23.45 | v32.22,17.34 v32.22,17.33 U1.P$AD6
  Route2 0.152: v32.23,15.41 32.34,15.52 32.34,16.49 32.47,16.61 32.47,17.14 32.28,17.34 v32.22,17.34
  Bottom 0.152: v26.37,23.45 28.45,23.45 29.88,22.03 29.88,21.97 29.56,21.66 29.24,21.66 27.49,19.91 27.49,19.33 28.04,18.77 28.04,14.99 27.92,14.86 27.92,14.15 28.57,13.5 29.16,13.5 31.08,15.41 v32.23,15.41
D-  (via drill 0.15, 0.15 layers 1-2, 0.2)
  Top 0.152: D3.6 26.76,25.6 26.72,25.63 26.64,25.63 v26.48,25.47 | U1.P$AD4 31.72,17.21 31.49,16.98 v31.49,16.87
  Route2 0.152: v31.49,16.87 31.49,16.51 v31.31,16.33
  Bottom 0.152: v26.48,25.47 26.64,25.63 26.73,25.63 30.18,22.18 30.18,21.1 29.68,20.6 29.59,20.6 29.16,20.18 29.16,19.2 28.39,18.42 28.39,14.9 28.22,14.74 28.22,14.28 28.69,13.81 28.84,13.81 31.31,16.29 v31.31,16.33
DN
  Top 0.152: J4.A7 24.05,27.9 24.29,27.66 24.29,27.15 24.68,26.75 | 24.68,26.75 25.14,26.3 D3.1 | 24.68,26.75 24.68,27.11 25.16,27.59 25.16,28.45 J4.B7
DP  (via drill 0.2)
  Top 0.152: J4.A6 24.55,29.51 24.54,29.53 23.85,29.53 23.79,29.47 23.55,29.23 J4.B6 23.55,27.56 v23.61,27.51 | v24.02,23.75 24.06,23.7 D3.3
  Route15 0.152: v23.61,27.51 23.61,24.15 v24.02,23.75
EPD_3V3  (via drill 0.2)
  Top 0.3: C1-EP-DR.1 14.77,16.72 Q1.3 19.91,15.88 L5.2 | C1-EP-DR.1 13.63,16.88 EPD_C5.2 | J1.16 J1.15 v9.9,15.99 | C1-EP-DR.1 13.41,16.66 v12.66,16.66
  Route15 0.3: v12.66,16.66 12,15.99 v9.9,15.99
EPD_BUSY  (via drill 0.2, 0.2 layers 1-2)
  Top 0.152: U1.P$AD12 33.74,17.29 v33.74,17.26
  Top 0.3: v9.94,19.01 10.57,19.01 J1.9
  Route2 0.152: v33.74,17.26 34.43,16.57 34.43,15.12 34.01,14.71 v34.01,14.29
  Bottom 0.152: v34.01,14.29 32.79,14.29 32.61,14.48 32.48,14.35 32.48,11.44 32.48,11.18 32.24,10.94 31.05,9.75 28.75,9.75 28.53,9.53 24.39,9.53 20.19,13.72 20.12,13.8 16.32,13.8 15.08,13.8 13.42,15.46 13.4,15.47 12.37,15.47 12.04,15.14 12.04,13.38 12.04,10.63 11.88,10.47 8.56,10.47 7.83,11.2 7.7,11.33 7.7,18.87 7.84,19.01 v9.94,19.01
EPD_CS  (via drill 0.15, 0.2 layers 1-2)
  Top 0.3: U1.P$K2 31.19,21.09 v31.19,21.11 | v9.96,17.48 9.96,17.49 J1.12
  Route2 0.152: v9.96,17.48 9,16.53 9,16.52 9,9.08 9,8.66 12.01,5.65 12.93,4.73 14.46,4.73 17.2,7.46 17.2,16.43 18.5,17.73 24.38,17.73 24.63,17.73 v26.48,19.58
  Route2 0.3: v31.19,21.11 30.14,22.15 29.29,22.15 v29.24,22.11
  Bottom 0.3: v26.48,19.58 29.05,22.15 29.2,22.15 v29.24,22.11
EPD_DC  (via drill 0.15, 0.2, 0.2 layers 1-2)
  Top 0.152: U1.P$AD10 33.22,17.21 33.2,17.19 v33.2,16.46
  Top 0.3: v9.94,18.02 10.57,18.02 J1.11
  Route2 0.152: v32.06,13.86 32.06,13.99 33.11,15.04 33.11,16.37 v33.2,16.46
  Route2 0.3: v12.63,17.23 12.08,17.23 11.36,17.94 11.29,18.02 v9.94,18.02
  Bottom 0.152: v12.63,17.23 12.73,17.34 14.46,17.34 17.68,14.12 20.31,14.12 24.37,10.07 30.79,10.07 32.16,11.44 32.16,13.75 v32.06,13.86
EPD_RST  (via drill 0.15, 0.15 layers 1-2, 0.2)
  Top 0.152: U1.P$AC11 v33.45,17.79 | v9.92,18.52 10.56,18.52 J1.10
  Route2 0.152: v33.45,17.79 33.34,17.67 33.34,16.93 33.61,16.66 33.61,8.54 29.47,4.4 16.41,4.4 16.07,4.75 16.07,5.29 16.85,6.07 17.02,6.24 v17.07,6.24
  Route15 0.152: v17.07,6.24 12.36,10.96 12.36,14.77 12.36,15.76 v12.27,15.85 | v9.92,18.52 12.07,18.52 12.07,18.59 v12.31,18.83
  Bottom 0.152: 12.25,18.77 v12.31,18.83 12.31,18.19 12.05,17.93 12.05,16.06 v12.27,15.85
GDR  (via drill 0.2)
  Top 0.152: Q3.1 13.95,11.84 13.9,11.79 13.59,11.47 R2_EP_DR.2 13.59,10.57 12.98,9.96 12.81,9.79 v12.73,9.79 | v9.93,23.87 9.93,23.06 9.94,23.05 9.94,22.79 10.24,22.49 J1.2
  Route2 0.15: v12.73,9.79 13.61,9.79 13.95,10.14
  Route2 0.152: 13.95,10.14 13.95,21.96 12.41,23.5 12.04,23.87 v9.93,23.87
GND  (via drill 0.2, 0.2 layers 1-2, 0.25)
  Top 0.152: 30.45,33.28 C16.2 30.63,33.11 | C10.2 | C14.2 37.56,30.3 | 39.25,24.6 39.32,24.53 | X1.4 40.17,24.53 39.32,24.53 | 39.25,24.6 39.47,24.83 C2.2 39.66,25.95 | 37.11,24.78 C12.2 | 37.53,25.19 38.66,25.19 39.25,24.6 | X1.2 40.72,22.4 40.52,22.4 40.51,22.39 | TP_GND.TP 2.11,8.49 | 6.45,4.58 SJ1.1 | 13.15,23.57 EPD_C11.1 13.15,23.6 | 13.15,22 EPD_C9.1 | 13.13,21.24 EPD_C8.1 | EPD_C7.1 | 13.13,19.82 EPD_C6.1 | EPD_C5.1 | 25.55,20.25 C25.2 25.56,20.16 | 30.05,10.03 C20.2 30.09,9.62 | C19.2 32.17,7.51 | C29.1 35.64,3.95 SW_DN.1 | 3.75,8.51 3.95,8.71 | 30.35,25.63 30.37,25.63 C5.2 | C24.1 24.75,14.58 | 25.17,17.15 IC9.B1 25.01,17.5 | 25.01,17.5 IC9.C1 | IC9.C3 IC9.C2 24.95,17.55 25.01,17.5 | D4.1 23.47,22.98 | 23.47,24.29 23.56,24.38 23.83,24.65 | 41.47,10.9 U3.1 41.44,10.55 41.15,10.26 41.07,10.26 U3.9 40.69,9.47 40.5,9.28 40.5,8.96 U3.6 40.34,8.8 | 40.31,10.26 40.23,10.26 39.94,10.55 U3.4 | C22.2 42.37,20.5 C3.2 41.14,20.45 | C4.2 43.64,20.45 | 39.32,24.53 39.82,24.03 40.74,24.03 40.91,23.86 40.91,23.43 41.01,23.33 41.11,23.33 41.64,23.33 X1.2 | 39.46,30.3 39.5,30.25 39.66,30.1 | C9.2 40.76,19.21 | C37.1 24.37,12.83 | 36.69,4.51 36.71,4.49 | 39.93,6.58 IC2.B3 39.93,6.58 | 39.5,6.76 39.76,6.76 39.93,6.58 | 42.78,6.58 C34.1 | U1.P$B7 32.47,22.66 U1.P$75 | 25.5,3.78 25.8,3.78 26.11,4.08 26.2,4.18 26.2,4.29 | R1_USB.1 26.49,27.08 | 28.03,27.49 28.17,27.63 | J4.SH4 20.56,28.56 J4.A12_B1 21.11,27.3 21.23,27.18 | 37.5,21.92 37.44,21.98 36.8,21.98 U1.P$F23 | 12.72,6.03 12.81,5.94 v13,5.94 | X1.2 41.66,22.45 v41.74,22.36 | 41.74,19.21 v41.75,19.2 | U1.P$74 34.72,19.81 34.72,18.2 34.71,18.2 | U1.P$74 U1.P$85 U1.P$89 | U1.P$74 U1.P$80 | 41.57,4.24 41.57,4.21
  Top 0.152: IC2.B1 | IC2.B1 | 39.9,6.61 39.93,6.58 | IC3.9 30.64,7.95 | D3.2 25.17,24.69 | J2.3 13.44,30.24 13.03,30.24 J2.5 12.16,30.23 10.96,30.23 | v14.23,3.95 14.07,3.78 | 26.64,10.6 26.64,10.74 | 22.32,27.18 R2_USB.2 | EPD_C12.1 13.15,24.44 | 7.94,10.39 J1.MP2 | 12.66,11.07 12.66,11.13 | 12.8,15.87 12.86,15.87 | 2.89,4.88 3.19,4.58 | J1.MP1 7.94,20.7 7.52,20.28 7.52,15.88 8.22,15.18 8.4,14.99
  Route2 0.152: v41.74,22.36 41.75,22.35 v41.75,19.2 | v26.08,13.16 26.08,10.85 | 41.57,6.32 41.31,6.58 IC2.B1 | 35.57,17.35 35.48,17.44 35.57,17.35
  Route15 0.152: v13,5.94 12.95,5.98 12.95,7.09 12.51,7.53
  Bottom 0.152: 8.77,2.81 8.96,2.81 | J4.SH2 20.21,33.06 | 20.21,29.68 20.21,29.08 21.05,28.24 22.25,28.24 23.58,29.57 24.65,29.57 24.95,29.27 25.19,29.03 25.19,28.19 26.83,26.55 | 28.87,30.28 28.62,30.52 | 29.1,27.91 29.1,28.91
  other vias: 30.49,9.22 30.03,13.72 26.49,24.69
  pour Top: 42.82,24.22 42.82,24.39 40.46,26.75 40.45,26.78 40.45,33.55 37.1,36.9 -1.29,36.9 -2.59,36.81 -2.59,-0.04 -0.98,-1.64 44.42,-1.64 46.21,0.15 46.21,24.06 42.98,24.06 42.95,24.07 42.84,24.19
  pour Route2: 43,24.12 42.97,24.13 40.67,26.44 40.66,26.46 40.66,26.49 40.67,26.52 40.93,26.78 40.93,33.1 37.6,36.43 -2.07,36.43 -2.59,36.17 -2.65,36.11 -2.65,0.16 -0.78,-1.71 44.16,-1.71 46.3,0.43 46.3,24.2 46.24,24.13 46.21,24.12
  pour Bottom: 42.93,24.18 42.93,24.44 40.67,26.71 40.66,26.74 40.66,33.47 38.06,36.07 -2.08,36.07 -2.1,36.07 -2.1,36.07 -2.1,36.07 -2.11,36.07 -2.56,36.22 -2.56,0.07 -0.87,-1.62 44.16,-1.62 46.03,0.25 46.03,24.08 45.98,24.12 42.99,24.12 42.97,24.13 42.94,24.16
HAPTIC_EN  (via drill 0.15, 0.2)
  Top 0.152: IC2.A1 41.19,6 42.07,5.12 42.07,4.22 v42.23,4.06 | U1.P$U1 30.67,19.3 29.82,18.46 29.39,18.46 28.66,19.19 v28.66,19.27
  Route15 0.152: v42.23,4.06 42.07,3.9 42.07,2.39 41.35,1.67 41.02,1.52 40.04,1.26 39.03,1.17 37.64,1.17 37.64,2.31 37.4,2.56 37.29,2.56 36.66,3.19 34.04,3.19 32.75,4.47 32.75,14.11 28.66,18.2 v28.66,19.27
IMU_INT1  (via drill 0.2, 0.2 layers 1-2, 0.35)
  Top 0.152: v29.56,6.32 v29.55,6.31 | U1.P$N1 v30.7,20.29
  Top 0.3: IC3.5 v29.56,6.32
  Route2 0.152: v25.01,10.93 26.81,9.12 v26.81,8.97 | v30.7,20.29 30.68,20.26 29.89,20.26 v29.81,20.18
  Bottom 0.152: v25.01,10.93 24.7,10.93 24.59,11.04 22.88,12.75 22.88,13.09 22.88,14.68 24.75,16.55 24.98,16.78 24.98,23.86 24.98,25.14 25.78,25.94 27.33,25.94 27.4,25.87 27.53,25.74 27.61,25.74 28,25.74 30.61,23.13 30.61,20.97 29.82,20.18 v29.81,20.18 | v26.81,8.97 28.27,7.51 28.3,7.48 28.3,6.56 28.3,6.54 28.58,6.26 29.5,6.26 v29.55,6.31
IMU_INT2  (via drill 0.15, 0.2, 0.2 layers 1-2)
  Top 0.152: IC3.6 v30.06,6.96 | U1.P$P2 v31.2,20.04 | v28.76,14.49 28.76,14.33 28.1,13.66 28.1,12.96 28.45,12.61 28.61,12.44 v28.61,12.41
  Route2 0.152: v31.2,20.04 31.13,19.97 31.01,19.97 30.89,19.85 v30.19,19.85 | v28.61,12.41 29.04,11.99 29.04,11.07 29.04,10.96 v29.45,10.55 30.06,9.93 v30.06,6.96
  Bottom 0.152: v30.19,19.85 30.19,19.27 29.33,18.4 29.23,18.31 29.23,17.28 29.12,17.16 29.12,14.84 29.04,14.75 28.77,14.49 v28.76,14.49
LX1
  Top 0.152: L7.1 21.64,17.22 24.14,17.22 IC9.B3 IC9.B2
LX2
  Top 0.152: L7.2 21.98,18.88 21.98,18.14 22.06,18.06 22.75,18.06 22.85,17.95 IC9.D3 IC9.D2
MOSI  (via drill 0.15, 0.2, 0.2 layers 1-2)
  Top 0.3: U1.P$B13 34,23.34 v34.01,23.34 | v9.22,17.66 9.22,16.92 9.64,16.5 9.65,16.49 J1.14
  Route2 0.3: v34.01,23.34 33.94,23.34 33.92,23.32 33.48,23.32 33.17,23.63 33.17,23.66 32.38,24.45 | 32.38,24.45 32.38,24.26 v32.2,24.07 | 32.38,24.45 31.22,23.29 31.22,23.11 30.93,22.81 30.51,22.81 30.22,23.11 30.22,23.76 29.53,24.45 27.15,24.45 26.76,24.06 26.23,24.06 25.94,24.35 19.57,24.35 19.5,24.29 9.77,24.29 9.17,23.69 9.17,18.35 9.17,17.71 v9.22,17.66
N$1
  Top 0.152: IC1.D1 26.16,12.73 26.25,12.73 26.51,12.98 26.51,13.71 R9.2
N$2
  Top 0.152: IC9.D1 25.54,17.95 R4.2
N$3
  Top 0.152: IC9.E1 25.84,18.35 26.37,17.82 26.4,17.79 26.4,17.48 27.23,16.66 R2.2
N$4
  Top 0.152: R3.2 28.46,9.83 28.46,9.09 IC3.1
N$5  (via drill 0.2 layers 1-2)
  Top 0.152: C20.1 30.7,11.06 v30.74,11.02 | U1.P$AC5
  Route2 0.152: v30.74,11.02 30.86,11.14 30.86,16.83 31.33,17.31 31.36,17.31 31.86,17.81 U1.P$AC5
  other vias: 31.97,17.81
N$6
  Top 0.152: C9.1 39.43,19.57 39.43,20.14 39.26,20.31 U1.P$N24
N$7
  Top 0.152: ANT1.1 41.96,26.98 44.37,24.65 44.37,23.28 L1.2 43.65,22.15 C4.1 43.64,21.45 C22.1
N$8
  Top 0.152: L1.1 43.07,23.08 41.92,21.93 41.53,21.93 C3.1 40.98,21.62 37.38,21.62 37.35,21.64 36.81,21.64 36.74,21.56 U1.P$H23
N$9  (via drill 0.2)
  Top 0.152: C2.1 41.66,24.57 X1.3 42.08,24.91 v42.65,24.91 | U1.P$A23 36.78,23.81 37.07,24.1 v37.6,24.1
  Route15 0.152: v42.65,24.91 42.65,23.56 39.94,23.56 39.36,24.13 37.63,24.13 v37.6,24.1
N$10
  Top 0.152: X1.1 40.16,23.39 C1.1 37.44,23.39 37.35,23.31 U1.P$B24
N$11
  Top 0.152: C5.1 30.76,23.97 30.29,23.5 30.29,23.14 30.54,22.89 30.64,22.89 U1.P$C1
N$12
  Top 0.152: C18.2 29.46,16.01 27.8,17.66 X2.2 27.8,19.02 27.49,19.33 27.49,19.77 27.8,20.08 28.79,20.08 28.93,20.22 28.93,21.35 29.24,21.66 29.6,21.66 30.08,22.14 30.86,22.14 30.93,22.06 U1.P$F2
N$13
  Top 0.152: X2.1 27.71,20.9 C17.2 28.14,22.72 29.56,22.72 29.81,22.48 30.86,22.48 30.93,22.56 U1.P$D2
N$14  (via drill 0.2 layers 1-2)
  Top 0.152: C11.1 39.17,28.79 v39.17,28.44 | U1.P$D23 v36.75,22.53 v36.75,22.52
  Route2 0.152: v36.75,22.52 37.79,23.57 37.82,23.57 39.17,24.91 v39.17,28.44
N$15  (via drill 0.2)
  Top 0.152: Q3.3 16.85,11.19 | 16.85,11.19 18.23,11.19 18.38,11.04 18.44,10.98 L5.1 | C2-EP-DR.2 18.97,19.64 18.75,19.42 18.31,18.98 D5.2 18.32,18.74 v18.32,17.84 | v16.82,10.34 16.82,11.16 16.85,11.19
  Route15 0.152: v18.32,17.84 15.91,15.43 15.91,12.07 16.19,11.79 16.19,10.97 v16.82,10.34
N$16
  Top 0.152: C13.1 35.35,26.09 35.25,25.98 35.25,23.84 U1.P$A18
N$17
  Top 0.152: L3.1 32.76,29.88 L2.2
N$18
  Top 0.152: L2.1 31.16,29.18 31.16,26.21 31.34,26.03 31.34,23.57 31.47,23.44 U1.P$B3
N$19  (via drill 0.2 layers 1-2, 0.35)
  Top 0.152: L3.2 31.73,33.3 C16.1 31.58,31.77 C15.2 31.63,30.33 C10.1 | U1.P$B5 31.97,23.44 31.65,23.77 31.65,26.16 31.62,26.18 C10.1 | U1.P$E24 37.26,22.35 v37.68,22.35 | C10.1 v32.27,30.95
  Route2 0.152: v37.68,22.35 39.97,24.64 39.97,29.5 39.52,29.95 38.12,29.95 32.88,29.95 32.49,30.34 32.49,30.46 32.49,30.73 v32.27,30.95
N$20
  Top 0.152: D2.1 18.36,22.8 18.57,23.01 19.85,23.01 D4.2 19.97,21 C2-EP-DR.1
N$22  (via drill 0.2)
  Top 0.15: v9.93,21.53 10.55,21.53 J1.4 | EPD_C2.2 13.16,12.91 v13.16,12.23
  Route2 0.15: v9.93,21.53 10.71,22.31 12.26,22.31 13.46,21.11 13.46,12.53 v13.16,12.23
N$23
  Top 0.152: R1_EP_DR.1 14.81,7.63 14.81,6.94 14.46,6.59 14.35,6.48 14.26,6.58 R_TYPE_SEL.2 10.69,6.58 10.42,6.3 8.54,6.3 8.36,6.12 SJ1.2
N$24  (via drill 0.15, 0.2)
  Top 0.15: EPD_C1.2 v13.1,14.65
  Top 0.152: v9.91,21 J1.5
  Route2 0.15: v9.91,21 10.82,21.91 12.21,21.91 13.07,21.04 13.1,21.01 v13.1,14.65
N$25
  Top 0.152: C32.2 40.69,4.76 IC2.A2
N$27  (via drill 0.15, 0.2)
  Top 0.152: EPD_C6.2 14.46,19.81 v14.48,19.78 | v9.92,14.52 10.56,14.52 J1.18
  Route2 0.152: v14.48,19.78 15.63,19.78 15.86,19.55 15.95,19.46 15.95,8.62 15.95,8.5 14.47,7.02 12.97,7.02 11.12,8.86 11.02,8.97 11.02,14.51 11,14.52 v9.92,14.52
N$28  (via drill 0.2, 0.35)
  Top 0.152: EPD_C7.2 15.66,20.51 v15.79,20.39 | v9.91,14.02 10.56,14.02 J1.19
  Route2 0.152: v9.91,14.02 10.46,14.02 10.66,13.82 10.66,8.78 12.79,6.65 14.63,6.65 16.38,8.4 16.38,20.35 16.34,20.39 v15.79,20.39
N$29
  Top 0.152: J4.A5 25.61,28.5 25.61,27.21 R1_USB.2
N$30
  Top 0.152: J4.B5 22.68,28.43 22.68,27.37 R2_USB.1
N$31  (via drill 0.2, 0.35)
  Top 0.152: EPD_C8.2 13.65,21.24 v16.79,21.24 | v9.92,13.53 10.55,13.53 J1.20
  Route2 0.152: v16.79,21.24 16.79,8.3 14.83,6.35 12.55,6.35 10.32,8.57 10.32,13.12 v9.92,13.53
  Route15 0.15: v16.79,21.24 16.79,22.17 16.7,22.26 16.25,22.71 13.82,22.71 13.59,22.71 12.09,24.2 9.47,24.2 9.45,24.18 8.3,23.04 8.3,14.31 8.3,13.92 8.77,13.46 9.84,13.46 v9.92,13.53
N$33  (via drill 0.2, 0.35)
  Top 0.152: EPD_C10.2 14.02,23.11 v14.91,23.11 | v9.9,12.49 J1.22
  Route15 0.15: v14.91,23.11 13.4,24.62 9.13,24.62 8.74,24.24 | 8.74,24.24 8.66,24.24 | 8.74,24.24 8,23.5 8,12.52 8.27,12.26 9.11,12.26 9.37,12.51 9.88,12.51 v9.9,12.49
  Bottom 0.152: v14.91,23.11 14.63,23.11
N$35  (via drill 0.2, 0.35)
  Top 0.152: v14.33,24.26 14.22,24.37 EPD_C12.2 | v9.91,11.43 10.53,11.43 J1.24
  Route15 0.15: v14.33,24.26 13.61,24.99 8.53,24.99 7.66,24.11 7.66,11.81 8.04,11.43 v9.91,11.43
OUT+
  Top 0.152: IC2.A3 TP_OP.TP
OUT-
  Top 0.152: TP_ON.TP 39.53,7.75 IC2.C3
P0.13  (via drill 0.2 layers 1-2)
  Top 0.152: SW_UP.2 10.56,4.65 C30.2 10.75,5.53 10.8,5.58 10.99,5.76 11.45,5.76 12.21,5.01 16.84,5.01 R5.1 17.48,4.41 17.63,4.41 v18.03,4.8 | U1.P$AD8 32.72,17.3 32.34,16.92 v32.02,16.92
  Route2 0.152: v32.02,16.92 32.02,16.38 31.17,15.54 31.17,13.43 32.46,12.14 32.46,8.25 29.74,5.53 23.26,5.53 22.53,4.8 v18.03,4.8
P0.14  (via drill 0.2 layers 1-2)
  Top 0.152: SW_ENT.2 R8.1 21.88,4.94 24.38,4.94 C31.2 25.04,4.73 v25.11,4.8 | U1.P$AC9 32.6,17.81 v32.56,17.77
  Route2 0.152: 25.11,4.75 | 25.11,4.75 27.97,4.75 28.45,5.22 29.86,5.22 32.98,8.34 32.98,12.21 31.85,13.34 31.48,13.7 31.48,13.89 31.98,14.38 32.79,15.2 32.79,17.54 | 25.11,4.75 v25.11,4.8 | 32.79,17.66 32.79,17.54 | 32.79,17.54 v32.56,17.77
P1.01  (via drill 0.2, 0.2 layers 1-2)
  Top 0.152: Q1.1 14.75,13.69 14.75,13.49 15.53,12.71 R_PWR_EPD.1 15.61,12.05 | 15.61,12.05 15.61,11.62 v15.66,11.57 | U1.P$Y23 v36.75,18.53 | v14.92,12.62 15.03,12.62 15.61,12.05
  Route2 0.15: v36.75,18.53 37.05,18.23 37.05,16.98 35.36,15.3 35.18,15.3 35.18,9.56 35.18,9.18 29.67,3.67
  Route2 0.152: v8.76,5.77 8.76,5.45 9.21,5 10.54,3.67 29.67,3.67 | v14.92,12.62 14.37,12.08 14.37,8.98 13.93,8.54 v12.55,8.54
  Bottom 0.152: v8.76,5.77 11.53,8.54 v12.55,8.54
P1.02  (via drill 0.2)
  Top 0.152: SW_DN.2 32.67,4.55 R7.1 35.24,4.96 35.29,5.01 35.29,5.18 35.42,5.31 35.86,5.31 36,5.18 36,5.11 C29.2 36.31,5.02 36.96,5.02 v37.03,5.1 | U1.P$W24 37.79,19.38 v37.88,19.38
  Route15 0.152: v37.88,19.38 38.54,18.72 38.54,17.67 36.94,16.07 36.94,5.19 v37.03,5.1
PMIC_INT  (via drill 0.15, 0.2, 0.2 layers 1-2)
  Top 0.152: IC1.A1 26.69,11.51 26.81,11.39 v26.81,11.36 | U1.P$T2 v31.2,19.54 v31.2,19.53 | v34.01,12.25 30.52,12.25 30.36,12.25 29.93,11.82 v29.57,11.82
  Route2 0.152: v31.2,19.53 31.11,19.44 29.76,19.44 v29.73,19.41
  Route15 0.152: v29.73,19.41 29.89,19.41 29.89,19.13 29.89,19.05 32.71,16.23 34.32,16.23 34.92,15.63 34.92,13.71 34.01,12.8 v34.01,12.25
  Bottom 0.152: v29.57,11.82 29.11,11.36 v26.81,11.36
PREVGH  (via drill 0.2, 0.35)
  Top 0.15: J1.21 v9.84,12.99
  Top 0.152: EPD_C9.2 13.76,21.98 14.19,21.55 15.95,21.55 16.48,22.08 17.2,22.08 17.27,22.01 17.56,21.72 17.56,21.69 17.66,21.59 v17.66,20.28 16.13,18.75 D5.1
  Bottom 0.152: v17.66,20.28 18.35,20.28 18.42,20.35 18.66,20.59 18.66,21.55 17.84,22.37 16.91,22.37 16.16,22.37 15.99,22.2 15.75,21.96 13.9,21.96 13.57,21.63 11.76,21.63 11.36,21.23 11.36,13.13 11.22,12.99 v9.84,12.99
PREVGL  (via drill 0.2, 0.35)
  Top 0.152: v16.2,23.49 16.15,23.44 | 16.15,23.44 14.89,22.18 D2.2 | EPD_C11.2 13.72,23.65 14.59,23.65 14.66,23.72 15.86,23.72 16.15,23.44 | v8.18,19.52 8.35,19.36 v8.35,18.38 | v9.88,11.94 9.93,11.99 J1.23
  Bottom 0.152: v16.2,23.49 16.2,23.77 15.11,24.86 13.88,24.86 12.45,23.44 11.1,23.44 8.75,23.44 8.16,22.85 8.16,19.89 | 8.16,19.89 8.17,19.89 | 8.16,19.89 8.16,19.54 v8.18,19.52 | v8.35,18.38 8.35,12.46 8.57,12.23 8.57,12.02 8.65,11.94 v9.88,11.94
RESE  (via drill 0.2)
  Top 0.15: v11.79,19.97 11.79,21.27 11.07,21.99 J1.3
  Top 0.152: Q3.2 14.68,9.72 14.31,9.35 14.26,9.3 R1_EP_DR.2 13.12,8.6 11.77,9.94 v11.77,18.98
  Route2 0.15: v11.77,18.98 11.77,19.95 v11.79,19.97
RESET  (via drill 0.2 layers 1-2)
  Top 0.152: 5.18,31.59 5.18,30.85 6.19,29.84 12.16,29.84 J2.6 | 5.18,31.59 TP_RESET.TP | v3.06,29.14 3.06,29.47 5.18,31.59 | U1.P$AC13 v33.97,17.8
  Route2 0.152: v3.06,29.14 3.91,29.14 8.68,24.37 8.68,8.54 12.74,4.48 14.46,4.48 14.92,4.01 29.56,4.01 34.74,9.19 34.74,16.83 33.97,17.6 33.97,17.77 v33.97,17.8
SCK  (via drill 0.15, 0.2, 0.2 layers 1-2)
  Top 0.152: U1.P$A12 33.69,23.84 v33.67,23.84 | v33.67,23.84 | v9.93,16.96 9.96,16.99 J1.13
  Route2 0.152: v33.67,23.84 33.66,23.85 v33.66,24.61
  Route15 0.152: v20.79,25.88 20.79,25.84 21.22,25.42 24.27,22.36 26.04,22.36 28.28,24.61 v33.66,24.61 | v18.7,24.87 19.36,24.21 19.36,21.01 16.11,17.76 12.41,17.76 12.31,17.66 10.55,17.66 9.76,17.66 9.34,17.24 9.62,16.96 v9.93,16.96
  Bottom 0.152: v20.79,25.88 19.78,24.87 v18.7,24.87
SCL  (via drill 0.15, 0.15 layers 1-2, 0.2, 0.2 layers 1-2)
  Top 0.152: IC1.B1 26.21,11.98 26.31,11.98 26.45,12.12 v26.83,12.12 | IC3.12 29.44,8.65 29.44,8.89 v29.04,9.29 | TP_SCL.TP 43.93,8.09 43.77,7.92 42.03,7.92 IC2.C1 41.19,7.43 41.2,7.44 41.2,7.88 40.94,8.15 U3.7 40.94,8.6 v41.45,8.08 | R17.2 21.94,6.77 v22.42,6.77 | U1.P$M2 v31.2,20.56 v31.19,20.55 | R4.1 v26.7,16.25
  Route2 0.152: v22.42,6.77 26.12,6.77 27.91,8.56 28.15,8.8 28.15,12.1 28.13,12.12 v26.83,12.12 | v37.74,10.32 37.81,10.25 38.3,10.25 39.76,10.25 40.93,9.08 41.45,8.55 v41.45,8.08 | v29.46,21.13 29.46,21.09 29.36,20.99 29.36,20.74 29.38,20.72 30.89,20.72 31.05,20.55 v31.19,20.55
  Route15 0.152: 26.76,12.15 26.62,12.15 26.28,12.48 26.19,12.57 26.19,13.51 26.2,13.52 29.04,13.52 v29.04,9.29 | 26.76,12.15 26.8,12.15 v26.83,12.12 | 26.76,12.15 25.96,11.35 25.74,11.35 25.45,11.64 25.45,13.32 26.54,14.41 26.54,16.09 v26.7,16.25 | v26.44,20.79 26.58,20.79 26.9,21.11 29.44,21.11 v29.46,21.13
  Bottom 0.152: v26.7,16.25 26.44,16.5 26.44,18.86 25.95,19.36 25.95,20.29 v26.44,20.79 | v37.74,10.32 36.61,9.19 29.13,9.19 v29.04,9.29
SDA  (via drill 0.15, 0.2, 0.2 layers 1-2, 0.25)
  Top 0.152: R18.2 26.76,7.12 | IC1.C1 26.21,12.38 26.28,12.38 26.32,12.43 26.38,12.43 26.81,12.86 26.81,12.91 26.84,12.94 | 26.84,12.94 28.22,14.32 R2.1 28.02,15.91 v27.51,15.91 | 26.76,7.12 27.62,7.12 28.51,8.01 IC3.2 29.5,8.01 v29.54,7.97 | 26.76,7.12 26.09,7.12 v25.88,7.32 | U3.8 41.47,8.9 v41.88,8.49 | v44.46,5.36 44.07,4.97 TP_SDA.TP | IC2.B2 v40.68,6.57 v40.67,6.57 | U1.P$L1 30.61,20.81 30.39,20.6 29.59,20.6 29.23,20.25 29.23,20.09 28.92,19.78 28.25,19.78 v28.02,19.55 | 26.84,12.94 26.85,12.95 v27.06,12.95
  Route2 0.152: v40.67,6.57 40.8,6.44 40.8,6.64 | 40.8,6.64 40.8,6.74 41.16,7.1 41.64,7.1 42.91,5.83 43.98,5.83 v44.46,5.36 44.46,7.03 44.34,7.16 42.97,8.52 41.9,8.52 v41.88,8.49 | v38.3,3.72 40.8,6.22 40.8,6.64
  Route15 0.152: v27.51,15.91 27.51,17.36 28.02,17.86 v28.02,19.55 | v27.06,12.95 27.06,12.63 27.36,12.34 27.36,8.8 v25.88,7.32
  Bottom 0.152: v29.54,7.97 29.87,7.97 33.37,4.47 33.74,4.11 37.29,4.11 37.92,4.11 v38.3,3.72
SWDCLK  (via drill 0.2)
  Top 0.152: U1.P$AA24 37.37,18.46 v37.9,18.46 | v6.6,28.25 5.62,28.25 TP_SWDCLK.TP 5.22,25.7 6.08,25.7 6.1,25.69 7.13,25.69 7.15,25.72 7.52,25.72 8.09,25.15 14.35,25.15 14.86,26.31 14.86,28.68 14.51,29.03 14.13,29.4 J2.4
  Route2 0.152: v28.68,26 26.18,26 25.35,26.83 19.88,26.83 19.41,26.37 17.87,24.83 16.25,24.83 15.8,24.83 15.26,25.37 14.39,25.37 14.2,25.18 8.3,25.18 8.07,25.41 7.74,25.74 7.74,27.88 7.37,28.25 v6.6,28.25
  Bottom 0.152: v37.9,18.46 39.34,19.9 39.34,20.51 39.34,24.14 39.1,24.38 37.95,25.54 37.46,25.54 29.1,25.54 28.99,25.65 28.68,25.95 v28.68,26
SWDIO  (via drill 0.2, 0.35)
  Top 0.152: U1.P$AC24 38.08,17.81 38.58,18.32 v39.07,18.32 | v43.96,18.89 43.96,17.42 TP_SWDIO.TP | 15.14,29.08 J2.2 15.39,29.16 18.14,29.16 18.58,28.71 18.58,28.62 18.58,25.83 v16.95,24.2
  Route2 0.152: v39.07,18.32 40.27,19.51 40.27,20.2 40.27,21.02 v40.28,21.04
  Route15 0.152: v43.96,18.89 43.82,19.04 43.04,19.04 42.31,18.32 v39.07,18.32
  Bottom 0.152: v40.28,21.04 40.28,23.64 37.37,26.55 28.23,26.55 27.93,26.25 25.24,26.25 25.23,26.25 21.8,26.25 19.46,23.91 17.35,23.91 17.23,24.02 17.05,24.2 v16.95,24.2
SWO  (via drill 0.2)
  Top 0.152: U1.P$AD22 36.22,16.3 36.24,16.27 36.59,15.92 36.77,15.92 v37.83,15.92 | v42.58,14.12 43.11,14.12 TP_SWO.TP
  Route15 0.152: v37.83,15.92 37.86,15.95 40.75,15.95 v42.58,14.12
VBAT  (via drill 0.2, 0.2 layers 1-2)
  Top 0.3: IC1.C2 25.5,12.31 C37.2 24.98,12.63 v24.72,12.38 | C27.2 40.94,11.58 U3.2 U3.3 40.44,11.42 v40.09,11.77
  Top 0.305: TP_VBAT.TP 40.94,13.81 40.94,11.58
  Route2 0.3: v31.93,9.77 31.29,9.77 30.18,10.87 30.18,12.09 28.55,13.72 25.92,13.72 25.57,13.37 25.57,13.22 24.73,12.38 v24.72,12.38
  Bottom 0.3: v31.93,9.77 33.93,11.77 v40.09,11.77
VBUS  (via drill 0.2 layers 1-2, 0.35)
  Top 0.3: IC1.A2 25.7,11.46 25.7,10.25 25.57,10.13 C38.2 25.57,9.4 25.37,9.2 v25.37,8.92 | D3.5 27.78,24.8 27.91,24.8 27.92,24.8 | v27.2,27.02 28.53,27.02 C43.1 28.96,26.66 28.96,26.58 29.29,26.25 29.29,25.75 29.12,25.58 29.12,24.83 C42.1 27.92,24.8 | J4.A9_B4 22.12,28.34 22.12,27.7 v22.18,27.65 | v30.99,17.65 30.99,17.54 U1.P$AD2 31.22,17.3 30.5,16.57 v29.6,16.57 | 27.92,24.8 28.77,23.94 29.12,23.94 v29.34,23.72 | v30.38,12.86 29.94,12.42 29.32,12.42 28.55,11.65 C21.1
  Top 0.305: J4.A4_B9 26.7,27.84 v26.42,27.56
  Route2 0.3: v25.64,30.09 24.2,30.09 22.28,28.16 22.18,28.06 v22.18,27.65 | v30.99,17.65 30.58,17.24 29.47,17.24 27.41,19.3 27.41,22.15 28.98,23.72 v29.34,23.72 | v26.42,27.56 26.66,27.56 v27.2,27.02
  Route15 0.3: 29.96,12.44 30.44,12.44 31,11.88 31,8.7 29.17,6.87 28.56,6.87 28.38,6.69 25.31,6.69 25.25,6.74 25.25,8.8 v25.37,8.92 | 29.96,12.44 31.2,13.68 31.2,15.1 29.73,16.57 v29.6,16.57 | 29.96,12.44 v30.38,12.86
  Bottom 0.3: v27.2,27.02 25.64,28.58 v25.64,30.09
VREG  (via drill 0.35)
  Top 0.3: TP_VREG.TP 20.86,10.18 21.76,10.18 23.02,10.18 23.24,10.4 23.24,10.7 C39.1 23.44,10.82 | IC9.A1 IC9.A2 IC9.A3 24.4,16.56 C23.1 24.32,15.11 24.27,15.11 24.09,14.93 24.09,14.67 C24.2 23.77,14.35 v23.77,13.22 | 23.44,10.82 23.44,10.12 23.49,10.07 v23.49,9.57 | IC1.B2 24.73,11.91 24.23,11.4 23.65,10.82 23.44,10.82
  Route15 0.3: v23.77,13.22 23.74,13.19 23.74,9.82 v23.49,9.57